# Altium PCB DMX Interface.PcbDoc (part 2 of 3)
Units mm, origin at the board's own origin, x right, y up, seen from the top; angles counter-clockwise.
Board outline 110 x 81.5 mm, 4 copper layers (Top Layer, Int1 (GND), Int2 (PWR), Bottom Layer), stack 1.586 mm thick; 144 components, 113 nets, 496 pads, 326 vias.
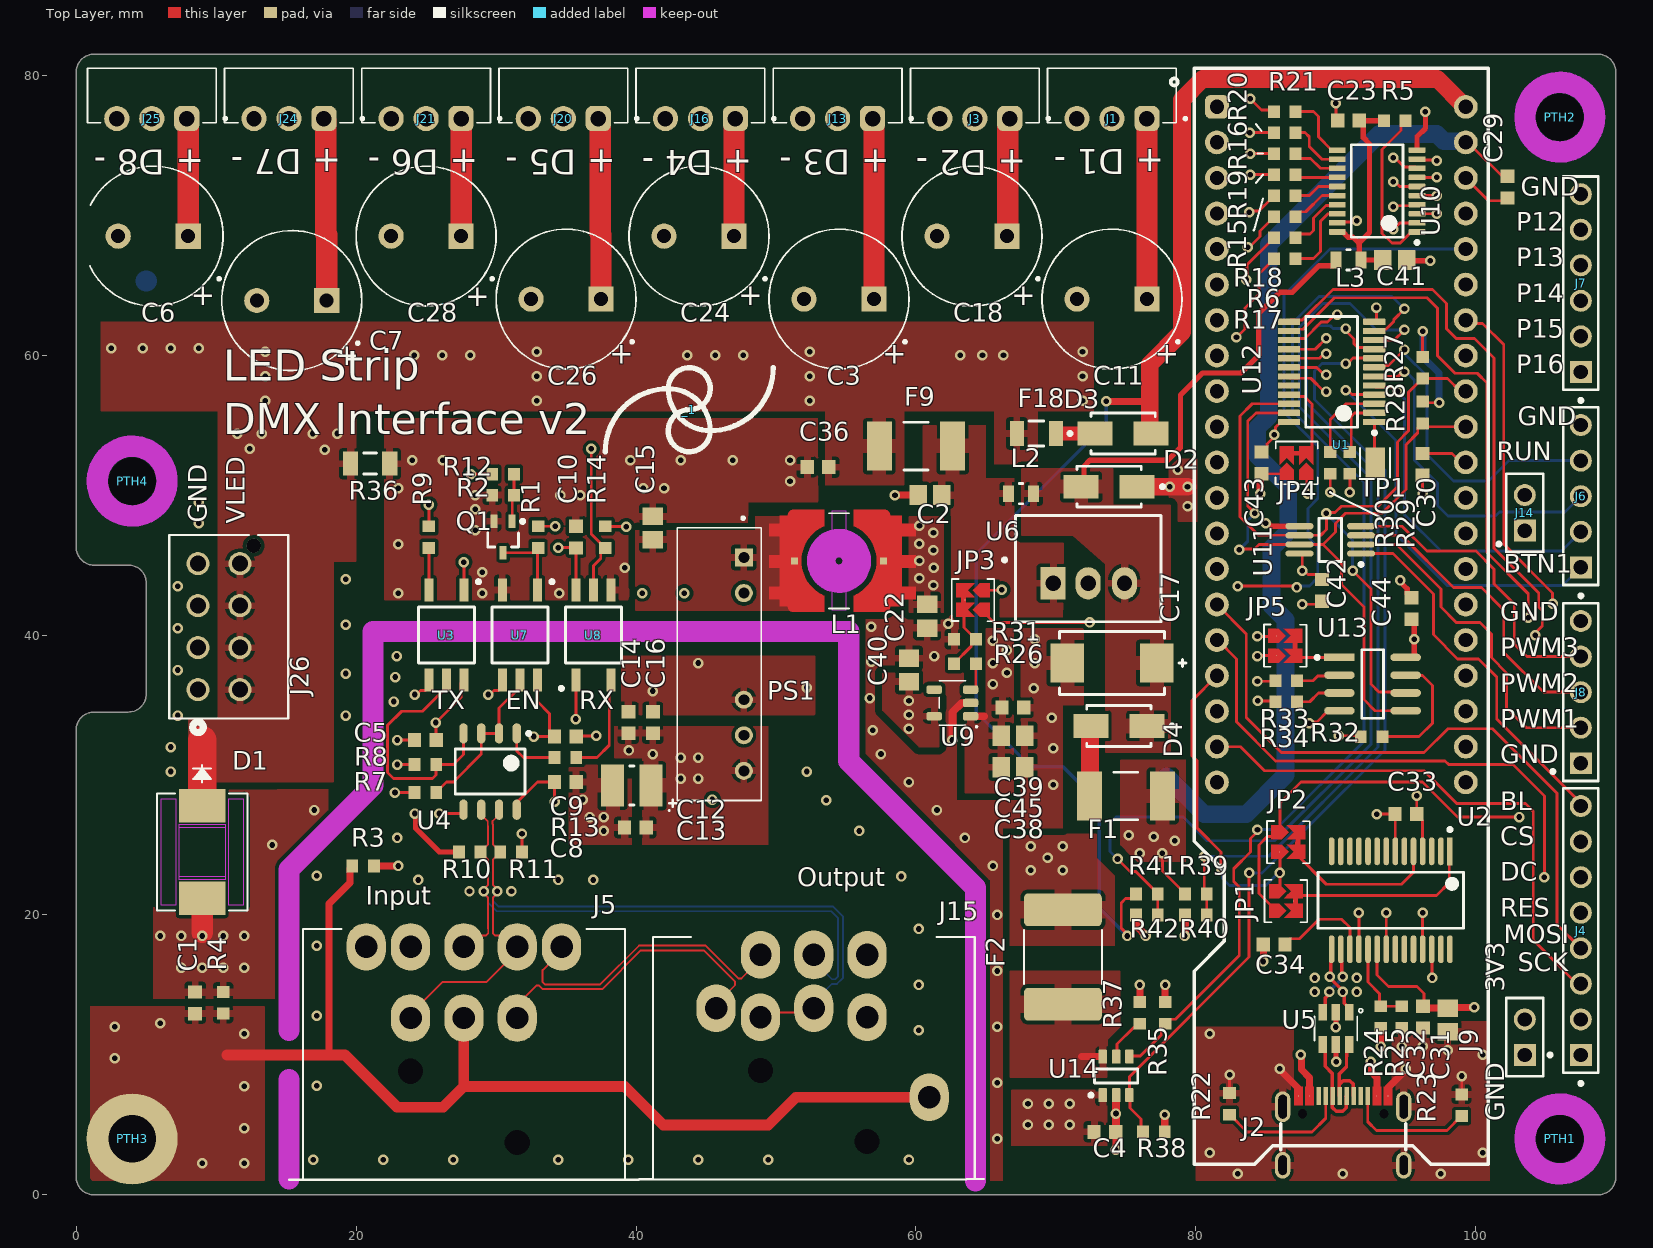
[diagram p0: Top Layer view]

## Part data (continued)
R37: library part CMP-009-00346-2, "100mW Thick Film Resistors 75V ±100ppm/℃ ±1% 18kΩ 0603 Chip Resistor - Surface Mount ROHS", Case/Package=0603, Max Operating Temperature=155°C, Min Operating Temperature=-55°C, Power=100mW, Tolerance=1%, Voltage Rating=75V, Mounting Technology="Surface Mount", Pins=2, RoHS Compliant=Yes
R40 R42: library part CMP-009-00345-1, "100mW Thick Film Resistors 75V ±100ppm/℃ ±1% 20kΩ 0603 Chip Resistor - Surface Mount ROHS", Case/Package=0603, JLCPN=C123417, Max Operating Temperature=155°C, Min Operating Temperature=-55°C, Power=100mW, Tolerance=1%, Voltage Rating=75V, Mounting Technology="Surface Mount", Pins=2, RoHS Compliant=Yes
TP1: library part CMP-00028-00009-4, "Test Point", Pins=1
U1: library part CMP-020-00030-3, "Raspberry Pi RP2350 and fully hardwired TCP/IP controller W6300"
U2: library part CMP-015-00034-4, "Integrated Circuit Interface USB-UART; RS-232; 12Mbs; 3.3-5.25V; -40+85 deg.C; SMD; SSOP28", Case/Package=SSOP, Max Operating Temperature=85°C, Max Supply Voltage=5.25V, Min Operating Temperature=-40°C, Min Supply Voltage=3.3V, Mounting Technology="Surface Mount", Pins=28
U3 U7 U8: library part CMP-00026-00002-1, "Logic IC Output Optocoupler, 1-Channel, 1-Element, 3750V Isolation, 20MBps", Max Operating Temperature=125°C, Min Operating Temperature=-40°C, Mounting Technology="Surface Mount", RoHS Compliant=Yes
U4: library part CMP-015-00028-2, "Line Transceiver, 1 Func, 1 Driver, 1 Rcvr, PDSO8", JLCPN=C3235232, RoHS Compliant=Yes
U5: library part CMP-128-000006-4, "Very low capacitance ESD protection", JLCPN=C7519, Manufacturer=STMICROELECTRONICS, Manufacturer_Part_Number=USBLC6-2SC6, Part_Type=IC
U6: library part CMP-019-00084-3, "8 W Single Output 5 V Non Isolated Through Hole DC/DC Converter", Case/Package=SMA, Max Operating Temperature=85°C, Max Power Dissipation=7.8W, Max Supply Voltage=36V, Min Operating Temperature=-40°C, Min Supply Voltage=7V, Output Current=1.5A, Output Voltage=5V, Mounting Technology="Through Hole", Pins=3
U9: library part CMP-019-00080-1, "1-A, low-IQ high-accuracy low-dropout (LDO) voltage regulator with enable 5-SOT-23 -40 to 125", Case/Package=SOT-23, Dropout Voltage=425mV, Max Supply Voltage=5.5V, Output Voltage=3.3V, Pins=5
U10: library part CMP-016-00027-3, "Bus Transceiver, ACT Series, 1-Func, 8-Bit, True Output, CMOS, PDSO20", Case/Package=TSSOP, JLCPN=C6931, Max Operating Temperature=85°C, Max Supply Voltage=5.5V, Min Operating Temperature=-40°C, Min Supply Voltage=4.5V, Nominal Supply Voltage=5V, Logic Type="BUS TRANSCEIVER", Pins=20, RoHS Compliant=Yes
U11: library part CMP-015-00036-1, "PCA9633 Series 25 mA 5.5 V 1 MHz SMT 8-bit I2C-Bus LED Driver - TSSOP-8", Case/Package=TSSOP, Max Operating Temperature=85°C, Max Supply Voltage=5.5V, Min Operating Temperature=-40°C, Min Supply Voltage=2.3V, Pins=8

## Text inside footprints (layer, text, board x,y; h text height)
C3: Top Overlay "+" at 59.326,60.698 h1.52 r180
C6: Top Overlay "+" at 9.946,64.9 h1.52 r180
C7: Top Overlay "+" at 20.226,60.598 h1.52 r180
C11: Top Overlay "+" at 78.826,60.698 h1.52 r180
C18: Top Overlay "+" at 68.546,64.9 h1.52 r180
C24: Top Overlay "+" at 49.046,64.9 h1.52 r180
C26: Top Overlay "+" at 39.826,60.698 h1.52 r180
C28: Top Overlay "+" at 29.546,64.8 h1.52 r180
J1: Top Courtyard "ALTERNATE FOOTPRINT - 1881451" at 77.007,85.642 h2.29 r180
J3: Top Courtyard "ALTERNATE FOOTPRINT - 1881451" at 67.207,85.642 h2.29 r180
J13: Top Courtyard "ALTERNATE FOOTPRINT - 1881451" at 57.407,85.642 h2.29 r180
J16: Top Courtyard "ALTERNATE FOOTPRINT - 1881451" at 47.607,85.642 h2.29 r180
J20: Top Courtyard "ALTERNATE FOOTPRINT - 1881451" at 37.807,85.642 h2.29 r180
J21: Top Courtyard "ALTERNATE FOOTPRINT - 1881451" at 28.007,85.642 h2.29 r180
J24: Top Courtyard "ALTERNATE FOOTPRINT - 1881451" at 18.207,85.642 h2.29 r180
J25: Top Courtyard "ALTERNATE FOOTPRINT - 1881451" at 8.407,85.642 h2.29 r180
U1: Mechanical 6 "USB end" at 88.993,80.28 h0.9; Mechanical 6 "RJ45 end - jack is low-profile, inside the 21x51 outline (WIZnet docs)" at 82.135,1.032 h0.9
U5: Mechanical 14 "4" at 89.22,10.984 h2.29 r180; Mechanical 14 "5" at 90.15,10.969 h2.29 r180; Mechanical 14 "6" at 91.1,10.969 h2.29 r180; Mechanical 14 "1" at 91.05,13.319 h2.29 r180; Mechanical 14 "3" at 89.22,13.324 h2.29 r180; Mechanical 14 "2" at 90.15,13.319 h2.29 r180